# Altium PCB buck.PcbDoc
Units mil, origin at the board's own origin, x right, y up, seen from the top; angles counter-clockwise.
Board outline 3897.64 x 3897.64 mil, 2 copper layers (Top Layer, Bottom Layer); 103 components, 47 nets, 282 pads, 352 vias.
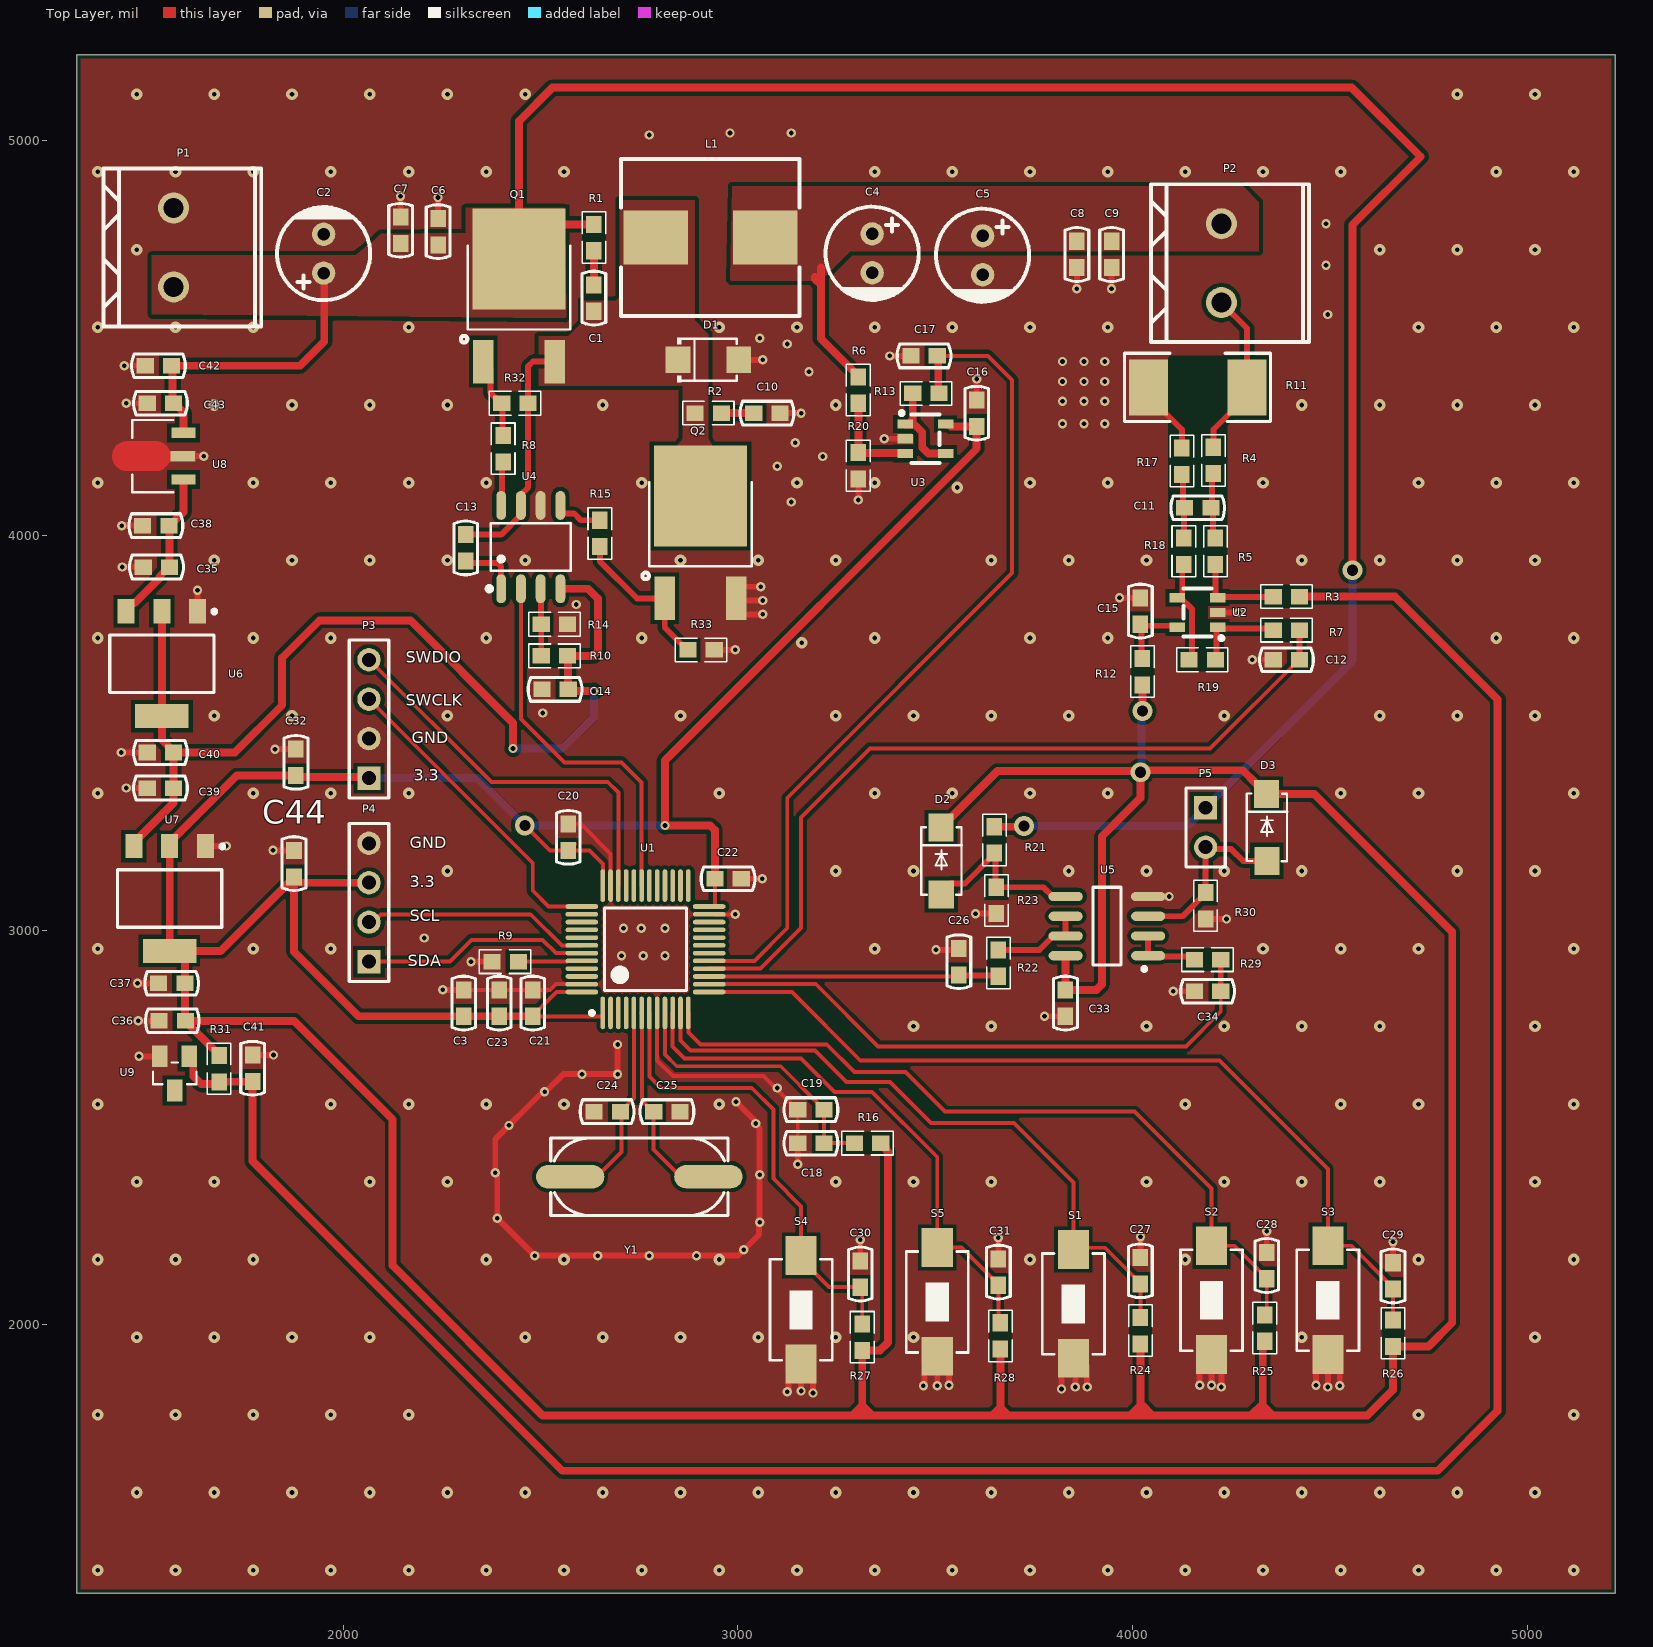
[diagram p0: Top Layer view]
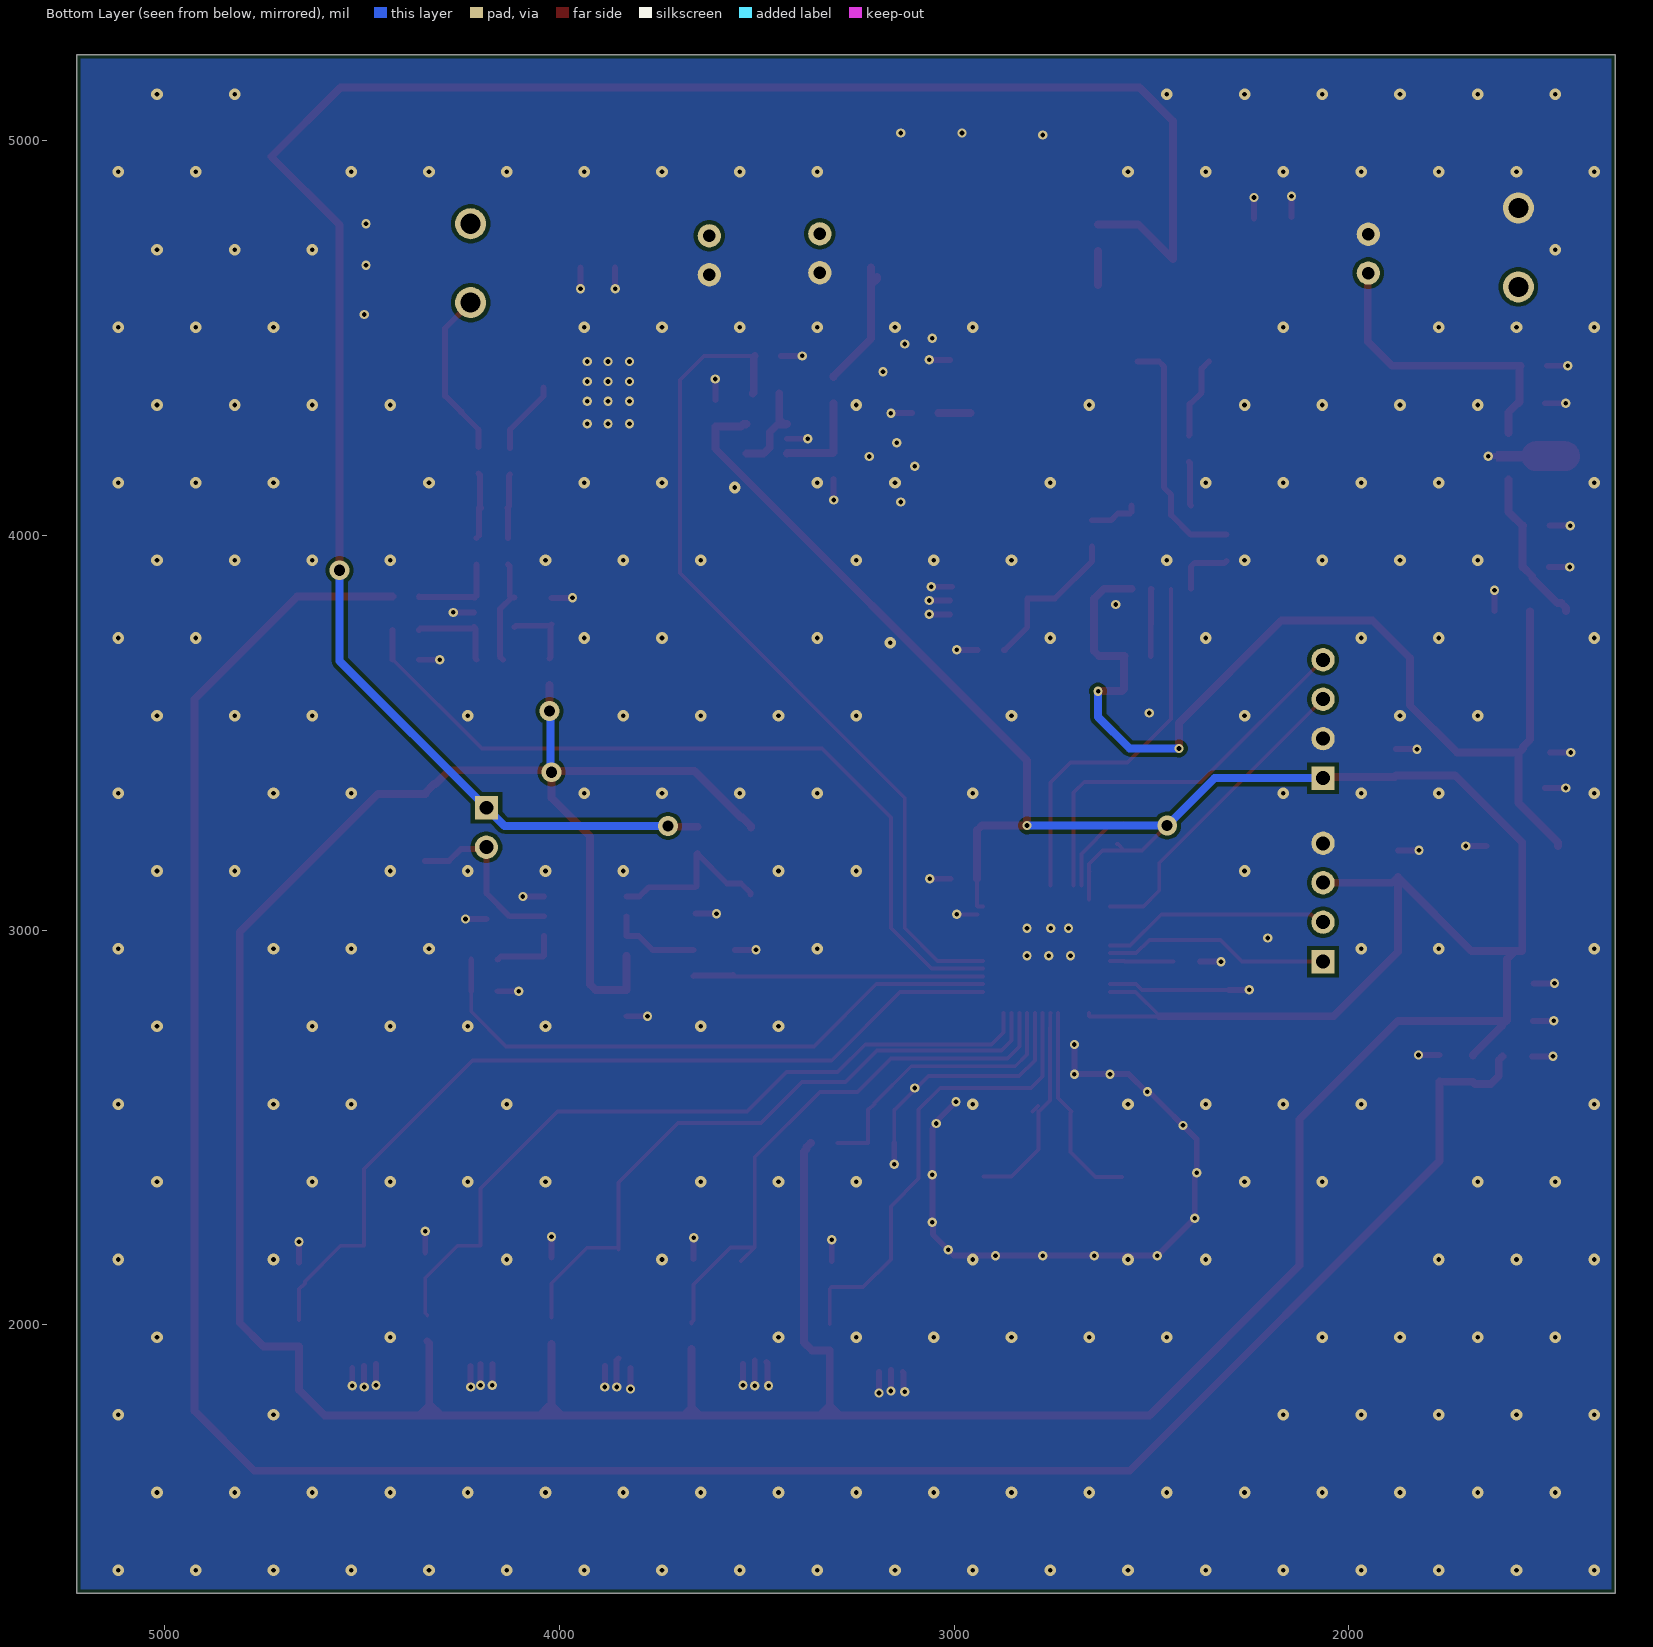
[diagram p1: Bottom Layer view, seen from below]

## Layer stack, top to bottom
Top Solder: solder mask 0.4, Solder Resist, Dk 3.5
Top Layer: signal copper 1.4
Dielectric 1: dielectric 12.6, FR-4, Dk 4.8
Bottom Layer: signal copper 1.4
Bottom Solder: solder mask 0.4, Solder Resist, Dk 3.5

## Board outline
1325,1320 1325,5217.64 5222.64,5217.64 5222.64,1320

## Design rules (kind name [scope] priority, off if disabled: settings)
BoardOutlineClearance [All] p1: gap=10 ignorepadtopadclearanceinfootprint=FALSE except(0: Arc-SplitContinuation Track-SplitContinuation SMDPad-SplitContinuation THPad-SplitContinuation Via-SplitContinuation Fill-SplitContinuation Poly-SplitContinuation Region-SplitContinuation Text-SplitContinuation)
Clearance [All] p1: gap=10 ignorepadtopadclearanceinfootprint=FALSE except(0: Arc-Hole Track-Hole SMDPad-Hole THPad-Hole Via-Hole Fill-Hole Poly-Hole Region-Hole Text-Hole; 1: Arc-Arc Arc-Track Arc-SMDPad Track-Track Track-SMDPad SMDPad-SMDPad)
PlaneConnect [All] p1: planeconnectstyle=Direct reliefexpansion=20 reliefentries=4 reliefconductorwidth=10 reliefairgap=10
PolygonConnect [All] p1: connectstyle=Direct reliefconductorwidth=10 reliefentries=4 polygonreliefangle="90 Angle" airgapwidth=10
RoutingVias [All] p1: holewidth=28 width=50 viastyle="Through Hole" minholewidth=28 minwidth=50 maxholewidth=28 maxwidth=50
SolderMaskExpansion [All] p1: expansion=4 istentingtop=FALSE
Width [All] p1: maxlimit=50 minlimit=8 preferedwidth=15
29 further rules are at their usual default settings.

## Classes and differential pairs
net class power: +3.3V +5 +12 GND

## Components (designator, comment, footprint, x,y, rotation, side; value= is the part's Value field where it differs from the comment)
C1 "？" C-RAD-0603 2635,4601.54 r90 top
C2 "Cap Pol" CAP-TH_BD6.0-P2.50-D0.5-FD 1950,4714.22 r90 top value=100uF
C3 "100nF" C-RAD-0603 2305,2815 r90 top
C4 "Cap Pol" CAP-TH_BD6.0-P2.50-D0.5-FD 3340,4715 r270 top value=100uF
C5 "Cap Pol" CAP-TH_BD6.0-P2.50-D0.5-FD 3620,4710 r270 top value=100uF
C6 "100nF" C-RAD-0603 2240,4770 r270 top
C7 "10uF" C-RAD-0603 2145,4773.46 r270 top
C8 "10uF" C-RAD-0603 3858.94,4712.03 r90 top
C9 "100nF" C-RAD-0603 3946.81,4712.03 r90 top
C10 "？" C-RAD-0603 3073.46,4310 r180 top
C11 "100nF" C-RAD-0603 4165,4070 r0 top
C12 "10nF" C-RAD-0603 4390,3685 r0 top
C13 "1uF" C-RAD-0603 2310,3968.46 r90 top
C14 "1uF" C-RAD-0603 2536.54,3610 r180 top
C15 "100nF" C-RAD-0603 4020,3808.46 r270 top
C16 "100nF" C-RAD-0603 3605,4310 r270 top
C17 "10nF" C-RAD-0603 3471.54,4455 r180 top
C18 "100nF" C-RAD-0603 3185,2460 r0 top
C19 "1uF" C-RAD-0603 3185,2545 r0 top
C20 "100nF" C-RAD-0603 2570,3235 r270 top
C21 "100nF" C-RAD-0603 2480,2815 r270 top
C22 "100nF" C-RAD-0603 2975,3130 r180 top
C23 "10uF" C-RAD-0603 2395,2815 r270 top
C24 "16pF" C-RAD-0603 2668.46,2540 r0 top
C25 "16pF" C-RAD-0603 2820,2540 r180 top
C26 "10nF" C-RAD-0603 3560,2920 r270 top
C27 "100nF" C-RAD-0603 4020,2136.54 r270 top
C28 "100nF" C-RAD-0603 4340,2150 r270 top
C29 "100nF" C-RAD-0603 4660,2123.46 r270 top
C30 "100nF" C-RAD-0603 3310,2128.46 r270 top
C31 "100nF" C-RAD-0603 3660,2133.46 r270 top
C32 "100nF" C-RAD-0603 1880,3425 r90 top
C33 "100nF" C-RAD-0603 3830,2815 r90 top
C34 "10nF" C-RAD-0603 4190,2845 r0 top
C35 "100nF" C-RAD-0603 1526.54,3920 r180 top
C36 "100nF" C-RAD-0603 1566.54,2770 r0 top
C37 "10uF" C-RAD-0603 1565,2865 r0 top
C38 "10uF" C-RAD-0603 1525,4025 r0 top
C39 "100nF" C-RAD-0603 1536.54,3360 r0 top
C40 "10uF" C-RAD-0603 1536.54,3450 r0 top
C41 "100nF" C-RAD-0603 1770,2650 r270 top
C42 "100nF" C-RAD-0603 1531.54,4430 r180 top
C43 "100nF" C-RAD-0603 1536.54,4335 r180 top
C44 "100nF" C-RAD-0603 1875,3168.46 r90 top
D1 "ss54f_c18199179" SMAF_L3.5-W2.6-LS4.7-RD-1 2925,4445 r0 top
D2 "Diode" SMA_L4.3-W2.6-LS5.0-FD 3515,3175 r90 top
D3 "Diode" SMA_L4.3-W2.6-LS5.0-FD 4340,3260 r90 top
L1 "xr1050-680m" IND-SMD_L11.5-W10.1_XR1050-680M 2930,4755 r0 top value=68uH
P1 "WJ500V-5.08-2P" CONN-TH_2P-P5.00_WJ500V-5.08-2P 1570,4730 r270 top
P2 "WJ500V-5.08-2P" CONN-TH_2P-P5.00_WJ500V-5.08-2P 4225,4690 r270 top
P3 "Header 4" HDR4X1_A 2065,3385 r90 top
P4 "Header 4" HDR4X1_A 2065,2920 r90 top
P5 "Header 2" HDR2X1_A 4185,3310 r270 top
Q1 "xr20n04" TO-252-3L_L6.6-W6.1-P4.60-LS9.5-BR-CW 2445,4570.39 r270 top
Q2 "xr20n04" TO-252-3L_L6.6-W6.1-P4.60-LS9.5-BR-CW 2905,3970.39 r270 top
R1 "?" 0603-1 2635,4755 r90 top
R2 "?" 0603-1 2925,4310 r180 top
R3 "100K" 0603-1 4390,3845 r0 top
R4 "1K" 0603-1 4205,4190 r90 top
R5 "1k" 0603-1 4210,3960 r90 top
R6 "10K" 0603-1 3305,4368.46 r90 top
R7 "10R" 0603-1 4390,3760 r0 top
R8 "10R" 0603-1 2405,4220 r90 top
R9 "10K" 0603-1 2410,2920 r180 top
R10 "10K" 0603-1 2535,3695 r180 top
R11 "10mR" 2512 4165,4375 r0 top
R12 "10R" 0603-1 4025,3655 r90 top
R13 "1K" 0603-1 3476.54,4360 r0 top
R14 "10K" 0603-1 2535,3775 r0 top
R15 "10R" 0603-1 2650,4005 r90 top
R16 "10R" 0603-1 3328.46,2460 r0 top
R17 "1K" 0603-1 4125,4188.46 r90 top
R18 "1k" 0603-1 4130,3960 r90 top
R19 "100K" 0603-1 4176.54,3685 r180 top
R20 "10K" 0603-1 3305,4176.54 r90 top
R21 "10k" 0603-1 3650,3228.46 r270 top
R22 "10R" 0603-1 3660,2916.54 r270 top
R23 "1k" 0603-1 3655,3075 r270 top
R24 "10K" 0603-1 4020,1985 r270 top
R25 "10K" 0603-1 4335,1991.54 r270 top
R26 "10K" 0603-1 4660,1978.46 r270 top
R27 "10K" 0603-1 3315,1968.46 r270 top
R28 "10K" 0603-1 3665,1971.54 r270 top
R29 "10R" 0603-1 4190,2925 r0 top
R30 "1k" 0603-1 4185,3061.54 r270 top
R31 "3.3k" 0603-1 1685,2648.46 r90 top
R32 "100K" 0603-1 2435,4335 r180 top
R33 "100K" 0603-1 2906.54,3710 r0 top
S1 "SW-PB" SW_PB2_A1 3850,2055 r180 top
S2 "SW-PB" SW_PB2_A1 4200,2064.41 r180 top
S3 "SW-PB" SW_PB2_A1 4495,2064.41 r180 top
S4 "SW-PB" SW_PB2_A1 3160,2040 r180 top
S5 "SW-PB" SW_PB2_A1 3505,2060 r180 top
U1 "STM32F103C" LQFP-48_M 2765.79,2951.42 r90 top
U2 "LMV321-L" SOT-23-5_L3.0-W1.7-P0.95-LS2.8-BR 4165,3805 r0 top
U3 "LMV321-L" SOT-23-5_L3.0-W1.7-P0.95-LS2.8-BR 3475,4245 r180 top
U4 "rt9624azs" SOP-8_L4.9-W3.9-P1.27-LS6.0-BL-1 2475,3970.61 r0 top
U5 "HT358VRZ" NSO8_N 3935,3010 r180 top
U6 "SPX1117M3-5.0" SOT-223 1540,3675 r180 top
U7 "SPX1117M3-3.3" SOT-223 1560,3080 r180 top
U8 "MG78M12N3" SOT-89-3_L4.5-W2.5-P1.50-LS4.2-BR 1541.61,4200.94 r0 top
U9 "LM385M3-1.2/TR" SOT-23-3_L2.9-W1.3-P1.90-LS2.4-BR 1572.6,2636.69 r90 top
Y1 "XTAL" X-SM49 2750,2375 r0 top value=8M

## Footprints (in the part's own frame and the unit in brackets; to place one, negate y for a bottom-side part, rotate by r counter-clockwise, add the part's x,y. Pads: shape width x height; smd on the part's side, far side on the other; paste and mask are expansions set on the pad)
0603-1 [mm] "贴片带丝印"
  rect 1.1x1 smd: 1(-0.85,0) 2(0.85,0)
  silkscreen extent -1.65,-0.76 1.65,0.76, body extent -1.14,-0.38 1.14,0.38, height 1
2512 [mm] "保险丝"
  rect 2.5x3.6 smd: 1(-3.175,0) 2(3.175,0)
  silkscreen extent -4.7,-2.2 4.7,2.2, body extent -3.17,-1.65 3.17,1.65, height 1.2
C-RAD-0603 [mm] "贴片电容"
  rect 1.1x1 smd: 1(-0.85,0) 2(0.85,0)
  silkscreen extent -1.73,-0.76 1.73,0.76, body extent -1.14,-0.38 1.14,0.38, height 1
CAP-TH_BD6.0-P2.50-D0.5-FD [mm]
  round 1.5 hole 0.8: 1(-1.25,0) 2(1.25,0)
  silkscreen extent -3,-3 3.08,3
CONN-TH_2P-P5.00_WJ500V-5.08-2P [mm]
  round 2 hole 1.3 paste+0 mask+0.051: 1(-2.54,0) 2(2.54,0)
  silkscreen extent -5.08,-4.52 5.08,5.64
HDR2X1_A [mm] "Connector; Header; 2 Position"
  rect 1.5x1.5 hole 0.9: 1(0,0)
  round 1.5 hole 0.9: 2(2.54,0)
  silkscreen extent -1.27,-1.27 3.81,1.27
HDR4X1_A [mm] "Connector; Header; 4 Position"
  rect 1.5x1.5 hole 0.9: 1(0,0)
  round 1.5 hole 0.9: 2(2.54,0) 3(5.08,0) 4(7.62,0)
  silkscreen extent -1.27,-1.27 8.89,1.27
IND-SMD_L11.5-W10.1_XR1050-680M [mm]
  rect 4.15x3.5 smd: 1(-3.525,0) 2(3.525,0)
  silkscreen extent -5.75,-5.05 5.75,5.05
LQFP-48_M [mm] "Thin QFP, 48-Leads, Body 7x7mm, Pitch 0.5mm, IPC Low Density"
  oval 2.1x0.3 smd: 1(-4.1,2.75) 2(-4.1,2.25) 3(-4.1,1.75) 4(-4.1,1.25) 5(-4.1,0.75) 6(-4.1,0.25) 7(-4.1,-0.25) 8(-4.1,-0.75) 9(-4.1,-1.25) 10(-4.1,-1.75) 11(-4.1,-2.25) 12(-4.1,-2.75) 25(4.1,-2.75) 26(4.1,-2.25) 27(4.1,-1.75) 28(4.1,-1.25) 29(4.1,-0.75) 30(4.1,-0.25) 31(4.1,0.25) 32(4.1,0.75) 33(4.1,1.25) 34(4.1,1.75) 35(4.1,2.25) 36(4.1,2.75)
  oval 0.3x2.1 smd: 13(-2.75,-4.1) 14(-2.25,-4.1) 15(-1.75,-4.1) 16(-1.25,-4.1) 17(-0.75,-4.1) 18(-0.25,-4.1) 19(0.25,-4.1) 20(0.75,-4.1) 21(1.25,-4.1) 22(1.75,-4.1) 23(2.25,-4.1) 24(2.75,-4.1) 37(2.75,4.1) 38(2.25,4.1) 39(1.75,4.1) 40(1.25,4.1) 41(0.75,4.1) 42(0.25,4.1) 43(-0.25,4.1) 44(-0.75,4.1) 45(-1.25,4.1) 46(-1.75,4.1) 47(-2.25,4.1) 48(-2.75,4.1)
  silkscreen extent -4.22,-2.65 2.65,3.57, body extent -3.5,-3.5 3.5,3.5, height 1.6
NSO8_N [mm] "SOIC-max660"
  oval 2.2x0.6 smd: 1(-2.654,1.905) 2(-2.654,0.635) 3(-2.654,-0.635) 4(-2.654,-1.905) 5(2.654,-1.905) 6(2.654,-0.635) 7(2.654,0.635) 8(2.654,1.905)
  silkscreen extent -2.53,-2.5 0.9,2.88, body extent -1.95,-2.45 1.95,2.45, height 1.75
SMA_L4.3-W2.6-LS5.0-FD [mil]
  rect 70.9x63.8 smd: 1(-84.7,-0.3) 2(84.6,0.4)
  silkscreen extent -86,-52 86,51
SMAF_L3.5-W2.6-LS4.7-RD-1 [mm]
  rect 1.6x1.7 smd: 1(-1.96,0) 2(1.96,0)
  silkscreen extent -2.01,-1.43 1.83,1.42
SOP-8_L4.9-W3.9-P1.27-LS6.0-BL-1 [mm]
  oval 0.63x1.865 smd: 1(-1.905,-2.683) 2(-0.635,-2.683) 3(0.635,-2.683) 4(1.905,-2.683) 5(1.905,2.682) 6(0.635,2.682) 7(-0.635,2.682) 8(-1.905,2.682)
  silkscreen extent -2.82,-2.83 2.58,1.52
SOT-23-3_L2.9-W1.3-P1.90-LS2.4-BR [mm]
  rect 1.4x1 smd: 1(1.1,-0.95) 2(1.1,0.95) 3(-1.1,0)
  silkscreen extent -0.7,-1.4 0.7,1.4, body extent -1.27,-1.45 1.53,1.45, height 1.2
SOT-23-5_L3.0-W1.7-P0.95-LS2.8-BR [mm]
  rect 1x0.6 smd: 1(1.3,-0.95) 2(1.3,0) 3(1.3,0.95) 4(-1.3,0.95) 5(-1.3,-0.95)
  silkscreen extent -0.9,-1.78 1.65,1.55
SOT-89-3_L4.5-W2.5-P1.50-LS4.2-BR [mm]
  rect 1.575x0.672 smd mask+0.051: 1(1.356,-1.5) 2(1.315,0) 3(1.356,1.5)
  Top Layer region: -2.283,0.95 -0.429,0.95 -0.384,0.949 -0.34,0.946 -0.296,0.94 -0.252,0.933 -0.208,0.924 -0.165,0.912 -0.123,0.899 -0.081,0.884 -0.04,0.866 0,0.847 0.04,0.826 0.078,0.803 0.115,0.779 0.151,0.752 0.185,0.724 0.219,0.695 0.251,0.664 0.281,0.631 0.31,0.597 0.337,0.562 0.362,0.525 0.386,0.488 0.408,0.449 0.428,0.409 0.447,0.33 2.144,0.33 2.144,-0.33 0.447,-0.33 0.428,-0.409 0.408,-0.449 0.386,-0.488 0.362,-0.526 0.337,-0.562 0.31,-0.597 0.281,-0.631 0.251,-0.664 0.219,-0.695 0.185,-0.725 0.151,-0.753 0.115,-0.779 0.078,-0.804 0.04,-0.827 0,-0.848 -0.04,-0.867 -0.081,-0.884 -0.123,-0.899 -0.165,-0.913 -0.208,-0.924 -0.252,-0.934 -0.296,-0.941 -0.34,-0.946 -0.384,-0.949 -0.429,-0.95 -2.283,-0.95 -2.328,-0.949 -2.372,-0.946 -2.416,-0.941 -2.46,-0.934 -2.504,-0.924 -2.547,-0.913 -2.589,-0.899 -2.631,-0.884 -2.672,-0.867 -2.713,-0.848 -2.752,-0.827 -2.79,-0.804 -2.827,-0.779 -2.863,-0.753 -2.898,-0.725 -2.931,-0.695 -2.963,-0.664 -2.993,-0.631 -3.022,-0.597 -3.049,-0.562 -3.075,-0.526 -3.098,-0.488 -3.12,-0.449 -3.141,-0.409 -3.159,-0.369 -3.175,-0.327 -3.189,-0.285 -3.202,-0.242 -3.212,-0.199 -3.22,-0.155 -3.227,-0.111 -3.231,-0.067 -3.233,-0.022 -3.233,0.022 -3.231,0.067 -3.227,0.111 -3.22,0.155 -3.212,0.199 -3.202,0.242 -3.189,0.285 -3.175,0.327 -3.159,0.369 -3.141,0.409 -3.12,0.449 -3.098,0.488 -3.075,0.525 -3.049,0.562 -3.022,0.597 -2.993,0.631 -2.963,0.664 -2.931,0.695 -2.898,0.724 -2.863,0.752 -2.827,0.779 -2.79,0.803 -2.752,0.826 -2.713,0.847 -2.672,0.866 -2.631,0.884 -2.589,0.899 -2.547,0.912 -2.504,0.924 -2.46,0.933 -2.416,0.94 -2.372,0.946 -2.328,0.949 -2.283,0.95
  silkscreen extent -1.95,-2.33 0.7,2.33
SOT-223 [mm]
  rect 1.1x1.55 smd: 1(-2.3,-3.375) 2(0,-3.375) 3(2.3,-3.375)
  rect 3.45x1.55 smd: 4(0,3.375)
  silkscreen extent -3.5,-3.48 3.35,1.85, body extent -3.3,-3.94 3.3,3.43, height 0.8
SW_PB2_A1 [mm]
  rect 2x2.5 smd: 1(0,3.556) 2(0,-3.444)
  silkscreen extent -2,-3.19 2,3.31, body extent -2.03,-3.18 2.03,3.3, height 1.2
TO-252-3L_L6.6-W6.1-P4.60-LS9.5-BR-CW [mm]
  rect 2.8x1.3 smd: 1(3.292,-2.3) 3(3.292,2.3)
  rect 6.5x6 smd: 2(-3.292,0)
  silkscreen extent -4.17,-3.74 2.06,3.3
X-SM49 [mm]
  oval 4.4x1.5 smd: 1(4.45,0.004) 2(-4.45,-0.004)
  silkscreen extent -5.7,-2.5 5.72,2.5

## Part data
C1 C3 C6 C7 C8 C9 C10 C11 C12 C13 C14 C15 C16 C17 C18 C19 C20 C21 C22 C23 C24 C25 C26 C27 C28 C29 C30 C31 C32 C33 C34 C35 C36 C37 C38 C39 C40 C41 C42 C43 C44: library part Cap, "无极性电容", LatestRevisionDate=17-Jul-2002, LatestRevisionNote="Re-released for DXP Platform.", PackageReference=RAD-0.3, Published=8-Jun-2000, Publisher="Altium Limited"
C2 C4 C5: "极性电解电容", LatestRevisionDate=17-Jul-2002, LatestRevisionNote="Re-released for DXP Platform.", PackageReference=RB7.6-15, Published=8-Jun-2000, Publisher="Altium Limited", Vol=50V
D1: library part SS54F, "二极管配置:独立式;正向压降(Vf):550mV@5.0A;直流反向耐压(Vr):40V;整流电流:5A;", Current - Rectified=5A, JLCPCB Part Class="Extended Part", LCSC Part Name="电压:40V 电流:5A", Manufacturer=R+O(宏嘉诚), Non-Repetitive Peak Forward Surge Current=120A, Operating Junction Temperature Range=-55℃~+125℃, Reverse Leakage Current (Ir)=200uA@40V, Voltage - DC Reverse(Vr)=40V, Voltage - Forward(Vf@If)=550mV@5.0A, AddInBom=yes, ConvertToPcb=yes, Datasheet=https://item.szlcsc.com/datasheet/SS54F/19354411.html, Diode Configuration=独立式, FootprintName=SMAF_L3.5-W2.6-LS4.7-RD-1, ManufacturerPart=SS54F, ModelId=4caf566195a049cf809ac17c4d641932, ModelName=SMAF_L3.5-W2.6-LS4.7-RD-1, ModelTransform=183.0705,102.362,0,0,0,0,0,0,0, Supplier=LCSC, Supplier Footprint=SMAF, SupplierPart=C18199179, Symbol=SS54F_C18199179
D2 D3: "二极管", PackageDocument=Sep-1996, Code_JEDEC=DO-214-AB, LatestRevisionDate=17-Jul-2002, LatestRevisionNote="Re-released for DXP Platform.", PackageReference=SMC, Published=8-Jun-2000, Publisher="Altium Limited", Type=1N4007
L1: "电感值:68uH;精度:±20%;额定电流:3A;饱和电流(Isat):3.8A;", Current - Saturation(Isat)=3.8A, Current Rating=3A, DC Resistance(DCR)=150mΩ, JLCPCB Part Class="Extended Part", LCSC Part Name="XR1050  68uH  ±20%   3.8A", Manufacturer=XR(祥如), ManufacturerPart=XR1050-680M, Tolerance=±20%, AddInBom=yes, ConvertToPcb=yes, Datasheet=https://item.szlcsc.com/datasheet/XR1050-680M/50640713.html, FootprintName=IND-SMD_L11.5-W10.1_XR1050-680M, ModelId=95bbcb4cdee94fed8217960e82aca4e3, ModelName=IND-SMD_L11.5-W10.1_XR1050-680M, ModelTransform=452.755,398.0307,0,0,0,0,0,0,0, Supplier=LCSC, Supplier Footprint=SMD,11.5x10.1mm, SupplierPart=C48391628, Symbol=XR1050-680M
P1 P2: "接线端子", Color=绿色, Current Rating (Max)=18A, JLCPCB Part Class="Extended Part", LCSC Part Name="5.08mm 排数:1 每排P数:2 直针 可拼接", Manufacturer=KANGNEX(康奈克斯电气), Operating Temperature Range=-40℃~+105℃, Voltage Rating (Max)=250V, Add into BOM=yes, Convert to PCB=yes, Datasheet=https://atta.szlcsc.com/upload/public/pdf/source/20191225/C8465_02D34CE5B5B4A53DF5891601D97FA9F4.pdf, Device=WJ500V-5.08-2P, Manufacturer Part=WJ500V-5.08-2P, Mounting Style=直针, Name=WJ500V-5.08-2P, Number of PINs Per Row=2, Number of Rows=1, Pitch=5.08mm, Supplier=LCSC, Supplier Footprint=直插,P=5.08mm, Supplier Part=C8465, Symbol=WJ500V-5.08-2P-14-00A, Wire Gauge - AWG=14~30, Wire Gauge - mm?=2.5
P3 P4 P5: "接插件", LatestRevisionDate=17-Jul-2002, LatestRevisionNote="Re-released for DXP Platform.", Publisher="Altium Limited"
Q1 Q2: library part XR20N04, "数量:1个N沟道;漏源电压(Vdss):40V;连续漏极电流(Id):20A;导通电阻(RDS(on)):40mΩ@10V;耗散功率(Pd):4W;阈值电压(Vgs(th)):2.2V;", Current - Continuous Drain(Id)=20A, Drain to Source Voltage=40V, Gate Threshold Voltage (Vgs(th))=2.2V, Input Capacitance(Ciss)=435pF, LCSC Part Name=N沟道40V快速开关MOSFET, Manufacturer=XNRUSEMI(新锐), Operating Temperature=-55℃~+150℃, Output Capacitance(Coss)=58pF, Pd - Power Dissipation=4W, Reverse Transfer Capacitance (Crss@Vds)=35pF, AddInBom=yes, ConvertToPcb=yes, Datasheet=https://item.szlcsc.com/datasheet/XR20N04/44527903.html, FootprintName=TO-252-3L_L6.6-W6.1-P4.60-LS9.5-BR-CW, Gate Charge(Qg)=11nC@10V, ManufacturerPart=XR20N04, ModelId=6963ffc0eb11445db0b75cbbfd87ce20, ModelName=TO-252-3L_L6.6-W6.1-P4.60-LS9.5-BR-CW, ModelTransform=374.015,259.842,0,0,0,0,-32.638,0,0, Number=1个N沟道, RDS(on)=40mΩ@10V, Supplier=LCSC, Supplier Footprint=TO-252-3L, SupplierPart=C42456813, Symbol=XR20N04, Type=N沟道
R1 R2 R3 R4 R5 R6 R7 R8 R9 R10 R11 R12 R13 R14 R15 R16 R17 R18 R19 R20 R21 R22 R23 R24 R25 R26 R27 R28 R29 R30 R31 R32 R33: library part Res1, "贴片电阻", LatestRevisionDate=17-Jul-2002, LatestRevisionNote="Re-released for DXP Platform.", PackageReference=AXIAL-0.4, Published=8-Jun-2000, Publisher="Altium Limited"
S1 S2 S3 S4 S5: "微动开关", LatestRevisionDate=17-Jul-2002, LatestRevisionNote="Re-released for DXP Platform.", PackageReference=SPST-2, Published=24-Mar-1999, Publisher="Altium Limited"
U1: "STM32单片机48引脚"
U2 U3: library part TLV3201AIDBVR, "比较器", JLCPCB Part Class="Extended Part", Manufacturer=TI(德州仪器), Add into BOM=yes, Convert to PCB=yes, Datasheet=https://atta.szlcsc.com/upload/public/pdf/source/20170919/C105188_1505787000291976628.pdf, Device=TLV3201AIDBVR, LCSC Part Name=TLV3201AIDBVR, Manufacturer Part=TLV3201AIDBVR, Name=TLV3201AIDBVR, Supplier=LCSC, Supplier Footprint=SOT-23-5, Supplier Part=C105188, Symbol=TLV3201AIDBVR
U4: library part RT9624AZS, "驱动配置:半桥;负载类型:MOSFET;驱动通道数:2;灌电流(IOL):-;拉电流(IOH):-;工作电压:4.5V~13.2V;上升时间(tr):24ns；25ns;下降时间(tf):12ns;", Current - Output High(IOH)=-, JLCPCB Part Class="Extended Part", LCSC Part Name=单相同步整流降压型MOSFET驱动器, Manufacturer=RICHTEK(立锜), Operating Temperature=-40℃~+125℃, Quiescent Current(Iq)=120uA, Voltage - Supply=4.5V~13.2V, AddInBom=yes, ConvertToPcb=yes, Current - Output Low(IOL)=-, Datasheet=https://item.szlcsc.com/datasheet/RT9624AZS/178903.html, Driven Configuration=半桥, Fall Time=12ns, Features=使能关断；内置自举二极管；交错导通保护；死区时间控制, FootprintName=SOP-8_L4.9-W3.9-P1.27-LS6.0-BL, Input Logic Level - High=2.3V~3.2V, Input Logic Level - Low=700mV~1.4V, Load Type=MOSFET, ManufacturerPart=RT9624AZS, ModelId=75c24a7891ee4dd6bdac16a7163ff87e, ModelName=SOP-8_L4.9-W3.9-P1.27-LS6.0-BL-1, ModelTransform=192.913,236.22,0,0,0,0,-0.393,2.749,0, Number of Drivers=2, Propagation Delay tpHL=22ns；8ns, Propagation Delay tpLH=30ns；60ns, Rise Time=24ns；25ns, Supplier=LCSC, Supplier Footprint=SOP-8, SupplierPart=C167520, Symbol=RT9624AZS
U5: library part LM358, "双运放"
U6: "5.0V稳压芯片"
U7: "3.3V稳压芯片"
U8: "最大30V转12V，压差当电压大于3V时为1.8v，小于3V时为2.3V", JLCPCB Part Class="Extended Part", LCSC Part Name="12V 500mA 30V", Manufacturer=Megain(美佳音), Operating Temperature=-40℃~+85℃, Output Current=500mA, Output Voltage=12V, Power Supply Rejection Ratio (PSRR)=80dB@(1kHz), standby current=250uA, Voltage - Supply=30V, Voltage Dropout=1.8V@(500mA), AddInBom=yes, ConvertToPcb=yes, Datasheet=https://item.szlcsc.com/datasheet/MG78M12N3/53037687.html, Features=过流保护；热关断, FootprintName=SOT-89-3_L4.5-W2.5-P1.50-LS4.2-BR, ManufacturerPart=MG78M12N3, ModelId=6db690b7897d4d18a30d90c1b89525ee, ModelName=SOT-89-3_L4.3-W2.5-H1.6-LS4.1-P1.50, ModelTransform=161.417,169.291,0,180,0,0,-18.661,0,0, Noise=-, Number of Outputs=1, Output Configuration=正极, Output Type=固定, Supplier=LCSC, Supplier Footprint=SOT-89-3, SupplierPart=C50407967, Symbol=MG78M12N3
U9: JLCPCB Part Class="Extended Part", LCSC Part Name="1.2V 微功耗电压参考", Manufacturer=HGSEMI(华冠), Add into BOM=yes, Convert to PCB=yes, Datasheet=https://atta.szlcsc.com/upload/public/pdf/source/20200716/C507206_69C34F3D5BBAED8E3BE132CB46276FD0.pdf, Device=LM385M3-1.2/TR, Manufacturer Part=LM385M3-1.2/TR, Supplier=LCSC, Supplier Footprint=SOT-23-3, Supplier Part=C507206, Symbol=LM385M3-1.2/TR
Y1: "晶振", LatestRevisionDate=17-Jul-2002, LatestRevisionNote="Re-released for DXP Platform.", PackageReference=R38, Published=8-Jun-2000, Publisher="Altium Limited"

## Via types
v1: diameter 29.53, hole 11.81, Top Layer to Bottom Layer, tented both sides, 230 vias
v2: diameter 23.62, hole 11.81, Top Layer to Bottom Layer, tented both sides, 117 vias
v3: diameter 50, hole 28, Top Layer to Bottom Layer, tented both sides, 5 vias

## Nets (pads, with @x,y where several pads share a name; then routed paths per layer and width w, separated by ;. In a path a pad name is that pad's centre, name@x,y a point inside that pad or via, vN(x,y) a via of type N, cw(c..) or ccw(c..) an arc to the next point about the centre after c; other vN are vias at no path point)
+3.3V: C3.1 C16.2 C20.2 C21.2 C22.2 C23.2 C32.1 C33.2 C36.2 C37.2 C44.1 D2.2 D3.2 P3.1 P4.3 R12.1 R16.2 R24.2 R25.2 R26.2 R27.2 R28.2 R31.2 U1.1 U1.24 U1.36 U1.48 U3.5 U5.8 U7.2 U7.4 | length 14949.4
  Top Layer w10: v3(2460,3265) 2523.46,3201.54 C20.2 ; C20.2@2586.65,3218.19 2584.69,3218.19 2570,3203.5 C20.2 ; U1.48 2539.65,2843.15 2480,2783.5 C21.2 2656.68,2781.54 2657.52,2782.37 U1.1 ; U1.36@2656.68,3148.61 U1.36@2657.52,3147.78 ; U1.36@2657.52,3077.4 U1.36 U1.36@2657.52,3147.78 ; U1.24 2940.7,3059.68 2941.54,3060.52 C22.2 C22.2@2939.68,3131.85 ; C20.2 2623.46,3201.54 2657.52,3167.48 U1.36@2657.52,3147.78
  Top Layer w20: R31.2 1685,2683.9 1611.65,2757.24 1611.65,2760.31 C36.2@1601.97,2770 ; C44.1 C44.1@1875,3133.03 ; P4.3 1890,3120 1886.65,3123.35 1884.69,3123.35 C44.1@1875,3133.03 ; P3.1 2061.73,3388.27 1883.27,3388.27 C32.1 1729.8,3391.54 1560,3221.73 U7.2 U7.4 U7.4@1577.95,2947.13 ; C21.2 C23.2 C3.1 2038.46,2781.54 1875,2945 C44.1@1875,3133.03 ; C22.2 2941.54,3253.28 2929.82,3265 v2(2815,3265) 2815,3430 3605,4220 C16.2 3539.92,4276.54 3534.06,4282.4 U3.5 U3.5@3528,4280.59 ; R16.2 3363.9,2460 3373.58,2450.31 3373.58,2445.02 3380,2438.6 3380,1955 3360,1935 R27.2 3315,1795 ; D2.2 3514.6,3263.15 3536.5,3285.05 3540.05,3285.05 3658,3403 4017,3403 v3(4020,3400) ; R28.2 3665,1790 ; U5.8 3830,2934.49 C33.2 3908.46,2848.46 3922.51,2862.51 3922.51,3237.51 4020,3335 v3(4020,3400) ; R24.2 4020,1795 ; v3(4025,3555) R12.1 ; R25.2 4330,1953.07 4330,1800 ; U7.4@1577.95,2947.13 1689.09,2947.13 C44.1@1875,3133.03 ; U7.4@1577.95,2947.13 1598.46,2926.61 C37.2 1599.23,2864.23 1599.23,2770.77 C36.2 C36.2@1601.97,2770 ; C36.2@1601.97,2770 1875,2770 2125,2520 2125,2150 2505,1770 3290,1770 ; 3290,1770 3315,1770 ; 3290,1770 3315,1795 ; 3315,1770 3340,1770 ; 3315,1770 3315,1795 ; 3315,1795 3340,1770 ; 3340,1770 3645,1770 ; 3645,1770 3665,1770 ; 3645,1770 3665,1790 ; 3665,1770 3685,1770 ; 3665,1770 3665,1790 ; 3665,1790 3685,1770 ; 3685,1770 3995,1770 ; 3995,1770 4020,1770 ; 3995,1770 4020,1795 ; 4020,1770 4050,1770 ; 4020,1770 4020,1795 ; 4020,1795 4025,1795 4050,1770 ; v3(4020,3400) 4025,3405 4279.2,3405 4314.15,3370.05 4317.7,3370.05 4339.6,3348.15 D3.2 4460.4,3344.6 4810,2995 4810,2005 4750,1945 R26.2 4660,1835 4595,1770 4355,1770 ; 4050,1770 4300,1770 ; 4300,1770 4330,1770 ; 4300,1770 4330,1800 ; 4330,1770 4355,1770 ; 4330,1770 4330,1795 ; 4330,1795 4330,1800 ; 4330,1795 4355,1770
  Bottom Layer w20: P3.1 2340,3385 v3(2460,3265) v2(2815,3265) ; v3(4020,3400) 4022.5,3402.5 4022.5,3552.5 v3(4025,3555)
+5: C14.1 C39.2 C40.2 R10.1 U4.4 U6.2 U6.4 U7.3 | length 2667.9
  Top Layer w20: U7.3 1469.45,3221.73 1569.75,3322.03 1569.75,3359.75 C39.2 C40.2 ; U6.2 U6.4 1540,3482.69 1558.35,3464.35 1558.35,3459.69 1568.03,3450 C40.2 ; v2(2430,3460) 2430,3525 2170,3785 1940,3785 1845,3690 1845,3570 1725,3450 C40.2 ; U4.4 2620,3865 2645,3840 2645,3706.72 2633.28,3695 R10.1 2569.23,3694.23 2569.23,3610.77 C14.1 2574.31,3605.69 2634.31,3605.69 v2(2635,3605)
  Bottom Layer w20: v2(2430,3460) 2555,3460 2635,3540 v2(2635,3605)
+12: C35.1 C38.2 U6.3 U8.1 | length 403.7
  Top Layer w20: U6.3 1449.45,3816.73 1461.1,3828.39 1471.08,3828.39 1534.72,3892.03 1534.72,3896.69 1558.03,3920 C35.1 1559.23,3920.77 1559.23,4024.23 C38.2 1560.43,4025 1595,4059.57 U8.1
CUR_ADC: C12.2 R7.2 U1.16 | length 2059.5
  Top Layer w10: U1.16 3057.2,2902.2 3160,3005 3160,3285 3335,3460 4196.5,3460 4421.5,3685 C12.2
  Top Layer w15: C12.2 R7.2
GND: C2.2 C3.2 C4.2 C5.2 C6.1 C7.1 C8.1 C9.1 C10.1 C12.1 C14.2 C15.1 C16.1 C17.2 C18.1 C19.1 C20.1 C21.1 C22.1 C23.1 C24.1 C25.1 C26.1 C27.1 C28.1 C29.1 C30.1 C31.1 C32.2 C33.1 C34.1 C35.2 C36.1 C37.1 C38.1 C39.1 C40.1 C41.1 C42.2 C43.2 C44.2 D1.2 P1.1 P3.2 P4.4 Q2.3 R9.2 R11.1 R14.2 R17.2 R20.1 R23.2 R30.2 R33.2 S1.1 S2.1 S3.1 S4.1 S5.1 U1.8 U1.23 U1.35 U1.47 U2.2 U3.2 U4.6 U5.4 U6.1 U7.1 U8.2 U9.2 | length 6447.3
  Top Layer w10: C3.2 C23.1 C21.1 2524.21,2848.46 2538.58,2862.83 U1.47 ; C20.1@2570,3270.43 C20.1 2601.97,3268.46 2677.2,3193.23 U1.35 ; U1.8 2795.32,2669.68 2835,2630 3064.57,2630 3149.57,2545 C19.1 C18.1 ; U1.23@2940,3040 v2(2993.07,3040)
  Top Layer w15: v2(1436.93,3450) C40.1@1490,3450 ; v2(1438.46,4025) C38.1 ; v2(1440,3920) C35.2 ; v2(1445,4430) C42.2 ; v2(1450,3360) C39.1 ; v2(1450,4335) C43.2 ; v2(1478.46,2865) C37.1 ; v2(1480,2770) C36.1 ; v2(1482.13,2680) U9.2 ; U8.2 v2(1646.47,4200.94) ; U6.1 v2(1630.55,3860.94) ; U7.1 v2(1703.62,3212.87) ; C41.1 v2(1823.07,2683.46) ; v2(1821.93,3201.93) C44.2 ; v2(1826.93,3458.46) C32.2 ; C7.1 v2(2145,4860) ; C6.1 v2(2240,4856.54) ; v2(2251.93,2848.46) C3.2 ; v2(2323.46,2920) R9.2 ; v2(2695,2710) v2(2695,2635) v2(2605,2635) 2557.33,2635 2512.33,2590 v2(2510,2590) 2508.35,2588.35 2503.35,2588.35 2385,2470 2385,2382.67 2390,2377.67 v2(2390,2270) v2(2485,2175) v2(2645,2175) v2(2775,2175) v2(2895,2175) 3000,2175 3053.35,2228.35 3053.35,2258.35 v2(3055,2260) v2(3055,2380) 3055,2497.67 3045,2507.67 v2(3045,2510) 3043.35,2511.65 3043.35,2516.65 v2(2995,2565) ; R33.2 v2(2993.07,3710) ; Q2.3@3005,3870 v2(3058.07,3870) ; C22.1 v2(3061.54,3130) ; Q2.3@3010,3800 v2(3063.07,3800) ; Q2.3@3010,3835 v2(3063.07,3835) ; D1.2@3010,4445 v2(3063.07,4445) ; C10.1 v2(3160,4310) ; v2(3125,1830) 3125,1832.33 3128.13,1835.46 3128.13,1878.13 S4.1@3130,1880 ; v2(3151.54,2406.93) C18.1 ; v2(3160,1831.93) S4.1@3160,1885 ; v2(3190,1826.93) S4.1@3190,1880 ; v2(3305,4090) R20.1 ; C30.1 v2(3310,2215) ; v2(3370.74,4245) U3.2 ; v2(3385,4455) C17.2 ; v2(3470,1845) 3470,1847.33 3473.13,1850.46 3473.13,1903.13 S5.1@3475,1905 ; v2(3501.93,2950) C26.1@3555,2950 ; v2(3505,1845) S5.1@3505,1910 ; v2(3535,1846.93) S5.1@3535,1900 ; v2(3601.93,3041.54) R23.2 ; C16.1 v2(3605,4396.54) ; C31.1 v2(3660,2220) ; v2(3776.93,2781.54) C33.1 ; v2(3820,1836.93) S1.1@3820,1890 ; S1.1 3855,1910 v2(3855,1841.93) ; v2(3858.94,4625.5) C8.1 ; v2(3885,1841.93) S1.1@3885,1895 ; v2(3946.81,4625.5) C9.1 ; v2(3966.93,3841.93) C15.1 ; C27.1 v2(4020,2223.07) ; U5.4 v2(4092.56,3085) ; R11.1 4040,4353.35 4125,4268.35 R17.2 ; v2(4103.46,2845) C34.1 ; v2(4170,1846.93) S2.1@4170,1900 ; R30.2 v2(4238.07,3028.07) ; v2(4200,1846.93) S2.1@4200,1900 ; U2.2 v2(4269.26,3805) ; v2(4225,1841.93) S2.1@4225,1895 ; v2(4303.46,3685) C12.1 ; C28.1 v2(4340,2236.54) ; v2(4465,1846.93) S3.1@4465,1900 ; v2(4495,1841.93) S3.1@4495,1895 ; v2(4525,1845) S3.1@4525,1890 ; C29.1 v2(4660,2210)
  other v1: 1377.95,1377.95 1574.8,1377.95 1771.65,1377.95 1968.5,1377.95 2165.35,1377.95 2362.2,1377.95 2559.06,1377.95 2755.91,1377.95 2952.76,1377.95 3149.61,1377.95 3346.46,1377.95 3543.31,1377.95 3740.16,1377.95 3937.01,1377.95 4133.86,1377.95 4330.71,1377.95 4527.56,1377.95 4724.41,1377.95 4921.26,1377.95 5118.11,1377.95 1476.38,1574.8 1673.23,1574.8 1870.08,1574.8 2066.93,1574.8 2263.78,1574.8 2460.63,1574.8 2657.48,1574.8 2854.33,1574.8 3051.18,1574.8 3248.03,1574.8 3444.88,1574.8 3641.73,1574.8 3838.58,1574.8 4035.43,1574.8 4232.28,1574.8 4429.13,1574.8 4625.98,1574.8 4822.83,1574.8 5019.69,1574.8 1377.95,1771.65 1574.8,1771.65 1771.65,1771.65 1968.5,1771.65 2165.35,1771.65 4724.41,1771.65 5118.11,1771.65 1476.38,1968.5 1673.23,1968.5 1870.08,1968.5 2066.93,1968.5 2460.63,1968.5 2657.48,1968.5 2854.33,1968.5 3051.18,1968.5 3248.03,1968.5 3444.88,1968.5 4429.13,1968.5 5019.69,1968.5 1377.95,2165.35 1574.8,2165.35 1771.65,2165.35 2362.2,2165.35 2559.06,2165.35 2952.76,2165.35 3740.16,2165.35 4133.86,2165.35 4724.41,2165.35 5118.11,2165.35 1476.38,2362.2 1673.23,2362.2 2066.93,2362.2 2263.78,2362.2 3248.03,2362.2 3444.88,2362.2 3641.73,2362.2 4035.43,2362.2 4232.28,2362.2 4429.13,2362.2 4625.98,2362.2 5019.69,2362.2 1377.95,2559.06 1968.5,2559.06 2165.35,2559.06 2362.2,2559.06 2559.06,2559.06 2952.76,2559.06 4133.86,2559.06 4527.56,2559.06 4724.41,2559.06 5118.11,2559.06 3444.88,2755.91 3641.73,2755.91 4035.43,2755.91 4232.28,2755.91 4429.13,2755.91 4625.98,2755.91 5019.69,2755.91 1377.95,2952.76 1771.65,2952.76 1968.5,2952.76 3346.46,2952.76 4330.71,2952.76 4527.56,2952.76 4724.41,2952.76 5118.11,2952.76 2263.78,3149.61 3248.03,3149.61 3444.88,3149.61 3838.58,3149.61 4035.43,3149.61 4232.28,3149.61 4429.13,3149.61 4822.83,3149.61 5019.69,3149.61 1377.95,3346.46 1771.65,3346.46 1968.5,3346.46 2165.35,3346.46 2952.76,3346.46 3346.46,3346.46 3543.31,3346.46 3740.16,3346.46 3937.01,3346.46 4527.56,3346.46 4724.41,3346.46 5118.11,3346.46 1673.23,3543.31 1870.08,3543.31 2263.78,3543.31 2854.33,3543.31 3248.03,3543.31 3444.88,3543.31 3641.73,3543.31 3838.58,3543.31 4232.28,3543.31 4625.98,3543.31 4822.83,3543.31 5019.69,3543.31 3161.96,3727.8 1377.95,3740.16 1771.65,3740.16 1968.5,3740.16 2362.2,3740.16 2755.91,3740.16 3346.46,3740.16 3740.16,3740.16 3937.01,3740.16 4921.26,3740.16 5118.11,3740.16 1673.23,3937.01 1870.08,3937.01 2066.93,3937.01 2263.78,3937.01 2460.63,3937.01 2854.33,3937.01 3051.18,3937.01 3248.03,3937.01 3641.73,3937.01 3838.58,3937.01 4035.43,3937.01 4429.13,3937.01 4625.98,3937.01 4822.83,3937.01 5019.69,3937.01 3555.66,4121.5 1377.95,4133.86 1771.65,4133.86 1968.5,4133.86 2165.35,4133.86 2362.2,4133.86 2755.91,4133.86 3149.61,4133.86 3346.46,4133.86 3740.16,4133.86 3937.01,4133.86 4330.71,4133.86 4724.41,4133.86 4921.26,4133.86 5118.11,4133.86 1673.23,4330.71 1870.08,4330.71 2066.93,4330.71 2263.78,4330.71 2657.48,4330.71 3248.03,4330.71 4429.13,4330.71 4625.98,4330.71 4822.83,4330.71 5019.69,4330.71 1377.95,4527.56 1574.8,4527.56 1771.65,4527.56 2165.35,4527.56 2952.76,4527.56 3149.61,4527.56 3346.46,4527.56 3543.31,4527.56 3740.16,4527.56 3937.01,4527.56 4724.41,4527.56 4921.26,4527.56 5118.11,4527.56 1476.38,4724.41 4625.98,4724.41 4822.83,4724.41 5019.69,4724.41 1377.95,4921.26 1574.8,4921.26 1771.65,4921.26 1968.5,4921.26 2165.35,4921.26 2362.2,4921.26 2559.06,4921.26 3346.46,4921.26 3543.31,4921.26 3740.16,4921.26 3937.01,4921.26 4133.86,4921.26 4330.71,4921.26 4527.56,4921.26 4921.26,4921.26 5118.11,4921.26 1476.38,5118.11 1673.23,5118.11 1870.08,5118.11 2066.93,5118.11 2263.78,5118.11 2460.63,5118.11 4822.83,5118.11 5019.69,5118.11
  other v2: 3015,2190 2385,2385 2420,2505 3100,2600 2705,2935 2760,2935 2815,2935 2205,2980 2710,3005 2755,3005 2815,3005 2505,3550 2590,3825 3135,4085 3100,4175 3215,4200 3145,4235 3822.53,4283.19 3876.84,4283.19 3929.34,4283.19 3822.53,4340 3876.84,4340 3929.34,4340 3822.53,4390 3876.84,4390 3929.34,4390 3180,4415 3822.53,4440.66 3876.84,4440.66 3929.34,4440.66 3125,4485 3055,4500 4495,4560 4490,4685 4490,4790 2775,5015 2980,5020 3135,5020
NetC1_1: C1.1 C13.2 D1.1 L1.1 Q1.3 Q2.2 R2.2 R32.1 U4.7 | length 617.1
  Top Layer w15: C13.2 2400.02,4001.93 2450,4051.91 U4.7 2450,4103.18 2468.46,4121.65 R32.1 2468.46,4428.46 2480.78,4440.78 Q1.3
NetC1_2: C1.2 R1.1 | length 86.5
  Top Layer w20: C1.2 R1.1
NetC4_1: C4.1 C5.1 C8.2 C9.2 L1.2 P2.1 R6.2 | length 342.4
  Top Layer w20: 3195,4655 3195,4650 3210,4635 ; 3210,4678.77 3210,4635 ; R6.2 3305,4403.9 3210,4498.9 3210,4635
NetC10_2: C10.2 R2.1 | length 81.5
  Top Layer w20: R2.1 C10.2
NetC11_1: C11.1 R17.1 R18.2 | length 164.9
  Top Layer w15: R17.1 4128.27,4151.73 4128.27,4073.27 C11.1 4130.77,4069.23 4130.77,3994.23 R18.2
NetC11_2: C11.2 R4.1 R5.2 | length 172.5
  Top Layer w15: C11.2 C11.2@4201.73,4073.27 ; R4.1 4201.73,4153.27 C11.2@4201.73,4073.27 ; R5.2 4204.23,3999.23 4204.23,4070.77 C11.2@4201.73,4073.27
NetC13_1: C13.1 U4.1 | length 151.9
  Top Layer w15: C13.1 2315,3930 2391.21,3930 2400,3921.21 U4.1
NetC15_2: C15.2 R12.2 U2.5 | length 182
  Top Layer w15: C15.2 C15.2@4022.5,3772.5 ; R12.2 4022.5,3690.96 C15.2@4022.5,3772.5 ; U2.5 4110.11,3771.3 4023.7,3771.3 C15.2@4022.5,3772.5
NetC18_2: C18.2 C19.2 R16.1 U1.9 | length 729.1
  Top Layer w10: U1.9 2815,2685 2845,2655 3108.46,2655 3201.81,2561.65 3201.81,2559.69 3216.5,2545 C19.2 C18.2 R16.1
NetD2_1: D2.1 R21.2 R23.1 U5.5 | length 455.1
  Top Layer w15: D2.1 3515.3,3093.85 3539.7,3118.25 3575.22,3118.25 3650,3193.03 R21.2 3652.5,3192.5 3652.5,3110.96 R23.1 3773.96,3108.46 3797.42,3085 U5.5
NetD3_1: D3.1 P5.2 R30.1 U5.3 | length 456.2
  Top Layer w15: U5.3 4126.97,3035 4185,3093.03 R30.1 P5.2 4190,3205 4250,3205 4279.7,3175.3 D3.1
NetP2_2: P2.2 R4.2 R11.2 | length 503.6
  Top Layer w15: R4.2 4205,4268.35 4249.5,4312.84 4290,4353.35 R11.2@4290,4355.76 ; P2.2 4290,4525 R11.2 R11.2@4290,4355.76 ; R11.2@4248.29,4314.05 R11.2@4290,4355.76
  Top Layer w20: P2.2@4225,4574.1 P2.2
NetQ1_1: Q1.1 R8.2 R32.2 | length 209.4
  Top Layer w15: Q1.1 2372.54,4422.69 2372.54,4362.03 2399.57,4335 R32.2 2403.27,4333.27 2403.27,4255.2 R8.2
NetQ2_1: Q2.1 R15.1 R33.1 | length 396.2
  Top Layer w15: R15.1 2650,3935 2744.22,3840.78 Q2.1 2814.45,3766.65 2871.1,3710 R33.1
NetR3_1: R3.1 R5.1 U2.3 | length 229.2
  Top Layer w15: R5.1 4210,3846.71 4214.31,3842.4 U2.3 4217.48,3843.7 4355.24,3843.7 R3.1
NetR6_1: R6.1 R20.2 U3.3 | length 244.8
  Top Layer w20: R6.1 R20.2 3306.2,4208.8 3422.61,4208.8 U3.3
NetR7_1: R7.1 R19.1 U2.1 | length 228.7
  Top Layer w15: R19.1 4213.09,3688.09 4213.09,3764.51 U2.1 4219.98,3763.8 4352.74,3763.8 R7.1
NetR8_1: R8.1 U4.8 | length 112.4
  Top Layer w15: U4.8 2401.88,4078.1 2401.88,4183.41 R8.1
NetR9_1: R9.1 U1.44 | length 161.7
  Top Layer w10: R9.1 2566.56,2920 2568.45,2921.89 U1.44
NetR10_2: R10.2 R14.1 U4.3 | length 170.6
  Top Layer w15: U4.3 2500.77,3864.23 2500.77,3775.77 R14.1 R10.2
NetR13_1: R13.1 U3.1 U3.4 | length 246.2
  Top Layer w20: R13.1 3443.07,4293.78 3431.69,4282.4 U3.1 3425.63,4280.59 3448.01,4280.59 3467.09,4261.5 3467.09,4222.91 3482.4,4207.6 U3.4
NetR15_2: R15.2 U4.5 | length 125.1
  Top Layer w15: U4.5 2550,4060.05 2554.53,4055.52 2584.9,4055.52 2601.96,4038.46 R15.2
NetR18_1: R18.1 R19.2 U2.4 | length 268.3
  Top Layer w15: U2.4 U2.4@4121.69,3842.4 ; R18.1 4126,3922.54 4126,3846.71 U2.4@4121.69,3842.4 ; R19.2 4151,3692.93 4151,3813.09 U2.4@4121.69,3842.4
NetR22_1: R22.1 U5.6 U5.7 | length 235
  Top Layer w15: R22.1 3764.02,2950 3799.02,2985 U5.7 U5.6
NetR29_1: R29.1 U5.1 U5.2 | length 171.2
  Top Layer w15: U5.2 U5.1 4041.14,2933.35 4148.19,2933.35 R29.1
NRST: C30.2 R27.1 S4.2 U1.7 | length 1192.6
  Top Layer w10: U1.7 2775.63,2629.37 2805,2600 3035,2600 3090,2545 3090,2370 3160,2300 S4.2 3160,2165.75 3230.75,2095 C30.2 3315,2090 R27.1
PA0: C31.2 R28.1 S5.2 U1.10 | length 1453
  Top Layer w10: U1.10 2834.69,2705.31 2865,2675 3160,2675 3245,2590 3340,2590 3505,2425 S5.2 ; S5.2@3539.37,2161.22 S5.2 ; R28.1@3665,2003.03 R28.1 ; S5.2 3566.38,2195.59 3660,2101.97 C31.2 R28.1@3660,2011.97 ; R28.1@3660,2011.97 3665,2006.97 R28.1 ; R28.1@3660,2011.97 3660,2010 R28.1
PA1: C27.2 R24.1 S1.2 U1.11 | length 1679.5
  Top Layer w10: U1.11 2854.37,2720.63 2880,2695 3195,2695 3275,2615 3385,2615 3489.12,2510.88 3699.12,2510.88 3850,2360 S1.2 3854.41,2195 3930.04,2195 4020,2105.04 C27.2 R24.1
PA2: C28.2 R25.1 S2.2 U1.12 | length 1955.3
  Top Layer w10: U1.12 2874.4,2789.65 2874.4,2740.6 2905,2710 3225,2710 3295,2640 3425,2640 3525,2540 4005,2540 4200,2345 S2.2 4258.5,2200 4340,2118.5 C28.2 4340,2030 R25.1 R25.1@4335,2023.03
PA3: C29.2 R26.1 S3.2 U1.13 | length 2240
  Top Layer w10: U1.13 3136.85,2843.15 3310,2670 4220,2670 4495,2395 S3.2 4555,2200 4645.31,2109.69 4645.31,2104.69 C29.2 R26.1
PWM: U1.31 U4.2 | length 963.7
  Top Layer w10: U4.2 2450,3535.17 2560.17,3425 2705,3425 2755.94,3374.06 U1.31
SCL: P4.2 U1.42 | length 580.3
  Top Layer w10: P4.2 2075.39,3020 2095.39,3040 2475,3040 2553.74,2961.26 U1.42
SDA: P4.1 U1.43 | length 576
  Top Layer w10: P4.1 2270,2920 2325,2975 2505,2975 2538.43,2941.57 U1.43
SWCLK: P3.3 U1.37 | length 798
  Top Layer w10: P3.3 2480,3170 2480,3100 2520.32,3059.68 U1.37
SWDIO: P3.4 U1.34 | length 1006.7
  Top Layer w10: P3.4 2375,3375 2670,3375 2696.89,3348.11 U1.34
TEP_ADC: C34.2 R29.2 U1.14 | length 1529.8
  Top Layer w10: U1.14 3197.17,2862.83 3355,2705 4135,2705 4223.46,2793.46 C34.2
  Top Layer w15: C34.2 R29.2
VFB_ADC: C17.1 R13.2 U1.17 | length 2169.7
  Top Layer w10: U1.17 3041.89,2921.89 3125,3005 3125,3335 3695,3905 3695,4394.14 3634.14,4455 C17.1
  Top Layer w20: C17.1 3507.5,4452.5 3507.5,4362.5 R13.2
VIN: C2.1 C6.2 C7.2 C42.1 C43.1 P1.2 P5.1 Q1.2 R1.2 R21.1 U8.3 | length 6169.9
  Top Layer w20: U8.3 1595,4311.97 1571.97,4335 C43.1 1567.5,4337.5 1567.5,4427.5 C42.1 1890,4430 1951.72,4491.72 1951.72,4663.28 C2.1 ; R1.2 2533.46,4788.46 Q1.2 2445,5050 2530,5135 4555,5135 4730,4960 4557.13,4787.13 v3(4557.13,3911.84) ; R21.1 3722.56,3261.93 v3(3724.62,3264)
  Bottom Layer w20: v3(3724.62,3264) 4139,3264 P5.1 4557.13,3682.13 v3(4557.13,3911.84)
VIN_ADC: C26.2 R22.2 U1.15 | length 834.5
  Top Layer w10: U1.15 3659.45,2882.52 R22.2
  Top Layer w15: C26.2 3561.73,2884.8 3658.27,2884.8 R22.2
Vref_1.2V: C41.2 R3.2 R31.1 U9.1 | length 6372.2
  Top Layer w20: U9.1 1619.69,2670.31 1619.69,2630.31 1640,2610 1680,2610 R31.1 1685.77,2615.77 1769.23,2615.77 C41.2 1770,2415 2555,1630 4773.28,1630 4925,1781.72 4925,3585 4665,3845 R3.2
X1: C24.2 U1.5 Y1.2 | length 523.9
  Top Layer w10: Y1.2 2641.89,2374.83 2705,2437.94 2705,2536.93 C24.2 2736.26,2574.33 U1.5
X2: C25.2 U1.6 Y1.1 | length 548.1
  Top Layer w10: U1.6 2756.29,2789.65 2756.29,2752.94 2756.54,2752.7 2756.54,2568.03 2784.57,2540 C25.2 2786.54,2443.46 2839.98,2390.02 2854.84,2375.17 Y1.1 ; C25.2@2786.85,2554.69 C25.2@2801.54,2540
pads on no net: U1.2 U1.3 U1.4 U1.18 U1.19 U1.20 U1.21 U1.22 U1.25 U1.26 U1.27 U1.28 U1.29 U1.30 U1.32 U1.33 U1.38 U1.39 U1.40 U1.41 U1.45 U1.46 U9.3

## Polygon pours and split planes (outlines as drawn)
GND on Top Layer "NONET_L02_P-001" (solid, remove dead copper, pour order 25): 1325,1320 1325,5217.64 5222.64,5217.64 5222.64,1320
NetC4_1 on Top Layer "NONET_L02_P-001" (solid, pour order 24): 2985,4885 4280,4885 4320,4845 4320,4720 3285,4720 3210,4645 2980,4645
NetC1_1 on Top Layer "NONET_L02_P-001" (solid, pour order 15): 2925,4400 2925,4510 2890,4545 2890,4550 2855,4550 2855,4400
NetC1_1 on Top Layer "NONET_L02_P-001" (solid, remove dead copper, pour order 13): 2855,4400 2925,4400 2925,4245 2940,4220 2840,4220 2860,4245 2860,4390 2855,4395
NetC1_1 on Top Layer "NONET_L02_P-001" (solid, pour order 3): 2700,4850 2700,4605 2690,4595 2605,4595 2605,4540 2570,4505 2495,4505 2495,4380 2890,4380 2895,4385 2890,4390 2890,4850
VIN on Top Layer "NONET_L02_P-001" (solid, remove dead copper, pour order 1): 1545,4710 1515,4710 1515,4560 2565,4550 2565,4580 2560,4830 2310,4830 2310,4767.5 2095,4765 2080,4750 2030,4710 1710,4710
no net on Mechanical 1 "NONET_L02_P-001" (none): 1325,1320 1325,5217.64 5222.64,5217.64 5222.64,1320
GND on Bottom Layer "NONET_L02_P-001" (solid, remove dead copper, pour order 26): 1325,1320 1325,5217.64 5222.64,5217.64 5222.64,1320

## Other copper
Top Layer:
  pour cut-out: 4143.84,3890 4192.16,3890 4192.16,3717.78 4195.25,3714.68 4190.56,3710 4140,3710
  pour cut-out: 4095,4455 4090,4450 4090,3890 4240,3890 4240,3920 4240,4446.65 4230.79,4455.87

## Silkscreen, mask and mechanical layers (free items; w line width, h text height)
Top Overlay:
  text "SWDIO" at 2158,3678 h30
  text "SWCLK" at 2158,3568 h30
  text "GND" at 2173,3473 h30
  text "3.3" at 2178,3378 h30
  text "GND" at 2168,3208 h30
  text "3.3" at 2168,3108 h30
  text "SCL" at 2168,3023 h30
  text "SDA" at 2163.4,2908.09 h30
Mechanical 1:
  the board outline again, w10